# Altium PCB PCB1-PICO-IMU.PcbDoc
Units mm, origin at the board's own origin, x right, y up, seen from the top; angles counter-clockwise.
Board outline 18.29 x 15.26 mm, 4 copper layers (Top Layer, Layer 1, Layer 2, Bottom Layer), stack 0.603 mm thick; 29 components, 16 nets, 122 pads, 44 vias.
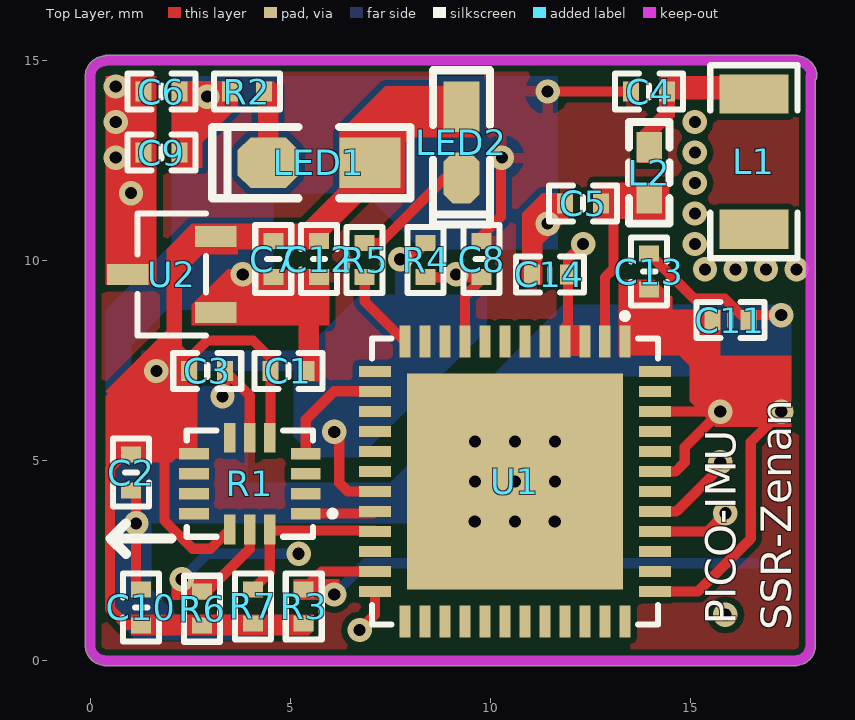
[diagram p0: Top Layer view]
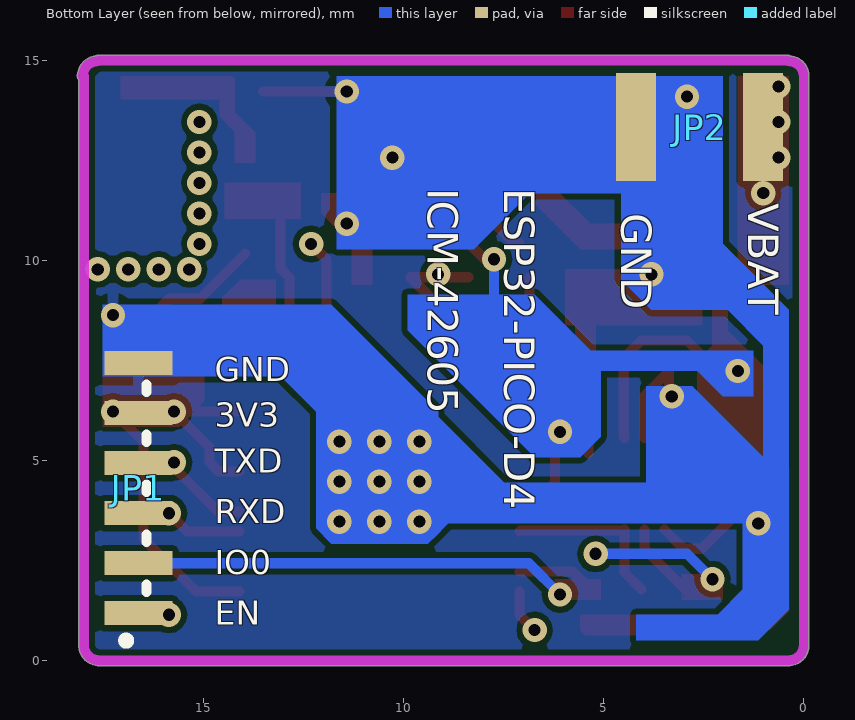
[diagram p1: Bottom Layer view, seen from below]
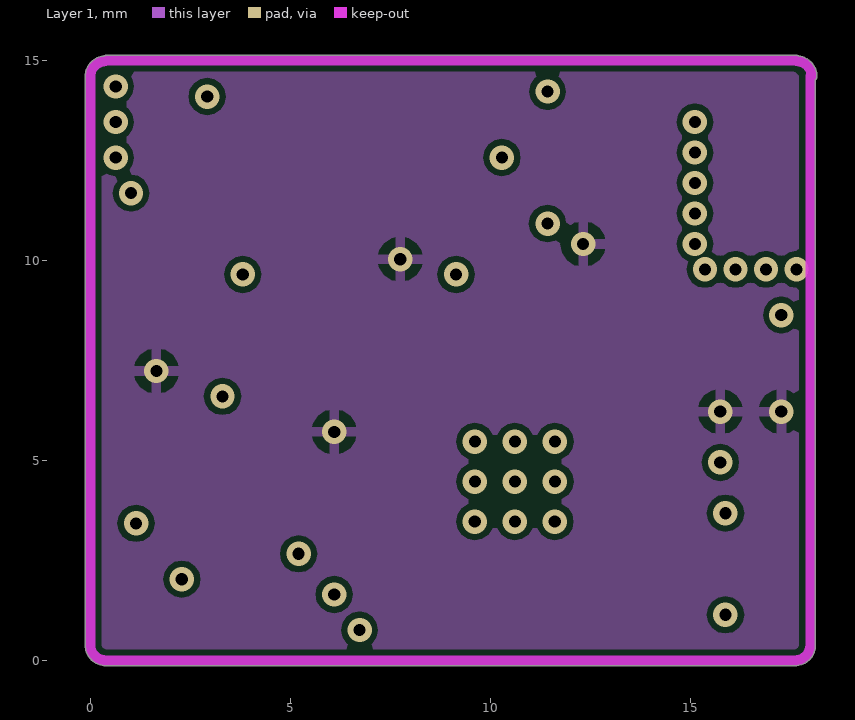
[diagram p2: Layer 1]
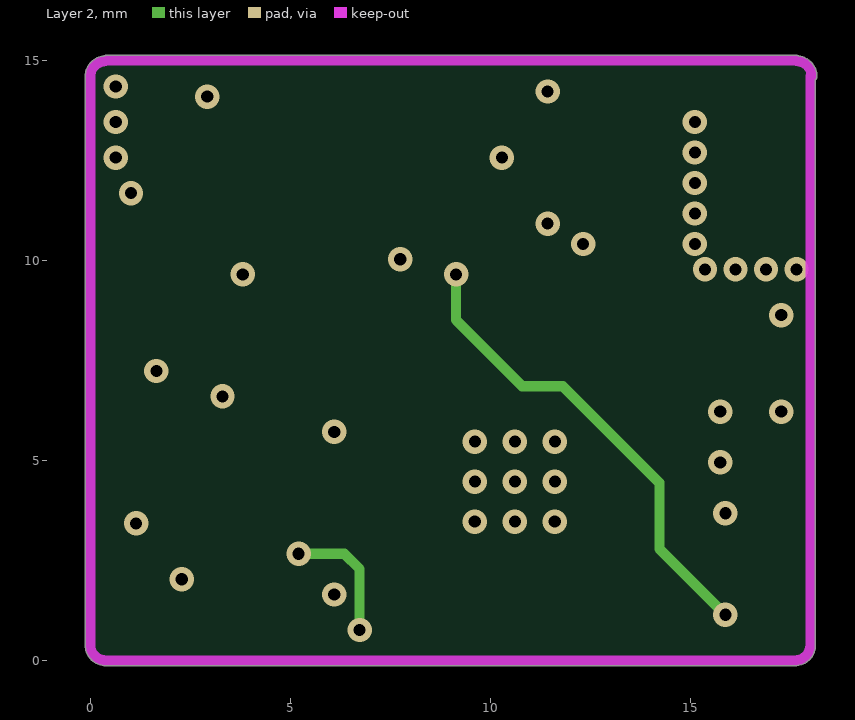
[diagram p3: Layer 2]
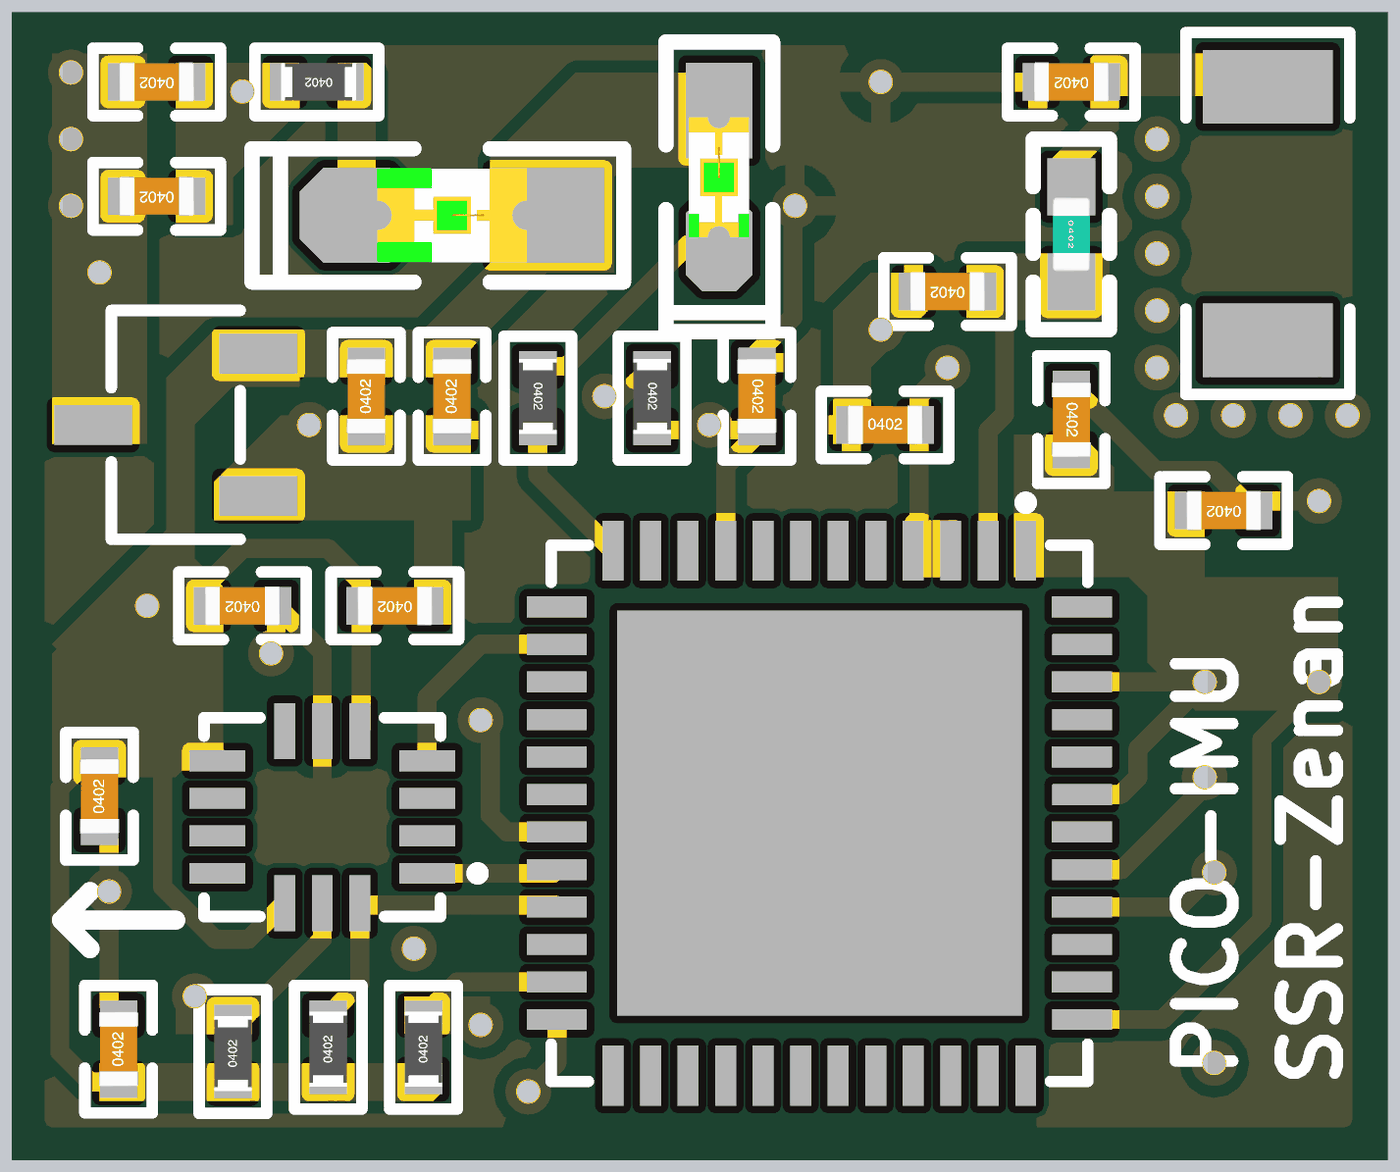
[diagram p4: 3D render of the assembled board from above, using the file's embedded part models]

## Layer stack, top to bottom
Top Solder: solder mask 0.0102, Solder Resist, Dk 3.5
Top Layer: signal copper 0.0356
Dielectric 2: prepreg 0.0711, PP-006, Dk 4.1
Layer 1: signal copper 0.035
Dielectric 1: dielectric 0.32, FR-4, Dk 4.8
Layer 2: signal copper 0.035
Dielectric 3: prepreg 0.0711, PP-006, Dk 4.1
Bottom Layer: signal copper 0.0356
Bottom Solder: solder mask 0.0102, Solder Resist, Dk 3.5

## Board outline
-0.127,0.381 ccw(c0.381,0.381) 0.381,-0.128 ccw(c0.381,0) 0.389,-0.127 17.611,-0.127 ccw(c17.619,0) 17.619,-0.128 ccw(c17.619,0.381) 18.128,0.381 ccw(c18.001,0.381) 18.128,0.389 18.128,14.518 ccw(c18.035,14.605) 18.162,14.605 ccw(c17.653,14.605) 17.718,15.109 ccw(c17.653,15) 17.653,15.127 0.395,15.127 ccw(c0.395,15) 0.333,15.111 ccw(c0.381,14.605) -0.127,14.605 ccw(c0,14.605) -0.127,14.597 -0.127,0.389 ccw(c0,0.381)

## Design rules (kind name [scope] priority, off if disabled: settings)
Clearance [All] p1: gap=0.152 ignorepadtopadclearanceinfootprint=FALSE except(0: Arc-Hole Track-Hole SMDPad-Hole THPad-Hole Via-Hole Fill-Hole Poly-Hole Region-Hole Text-Hole)
HoleToHoleClearance [All] p1: gap=0.102 allowstackedmicrovias=TRUE
MinimumSolderMaskSliver [All] p1: minsoldermaskwidth=0.102
PolygonConnect [All] p1: connectstyle=Relief reliefconductorwidth=0.254 reliefentries=4 polygonreliefangle="90 Angle" airgapwidth=0.254
RoutingVias [All] p1: holewidth=0.305 width=0.61 viastyle="Through Hole" minholewidth=0.305 minwidth=0.61 maxholewidth=0.381 maxwidth=0.635
SilkToSilkClearance [All] p1: silktosilkclearance=0.025
SilkToSolderMaskClearance [IsPad] p1: minsilkscreentomaskgap=0 clearancetoexposedcopper=TRUE
SolderMaskExpansion [All] p1: expansion=0.102
Width [All] p1: maxlimit=1.27 minlimit=0.152 preferedwidth=0.152
26 further rules are at their usual default settings.

## Classes and differential pairs
component class Sheet1: C1 C2 C3 C4 C5 C6 C7 C8 C9 C10 JP1 JP2 L1 L2 LED1 LED2 R1 R2 R3 R4 R5 R6 R7 U1 U2

## Components (designator, comment, footprint, x,y, rotation, side; value= is the part's Value field where it differs from the comment)
C1 "Cap" "C 0402_L" 4.953,7.239 r180 top value=10nF
C2 "Cap" "C 0402_L" 1.016,4.699 r90 top value=2.2uF
C3 "Cap" "C 0402_L" 2.921,7.239 r180 top value=0.1uF
C4 "Cap" "C 0402_L" 13.97,14.224 r180 top value=2.7pF
C5 "Cap" "C 0402_L" 12.319,11.43 r180 top value=4.7pF
C6 "Cap" "C 0402_L" 1.778,14.224 r180 top value=10uF
C7 "Cap" "C 0402_L" 4.572,10.033 r90 top value=10uF
C8 "Cap" "C 0402_L" 9.779,10.033 r270 top value=0.1uF
C9 "Cap" "C 0402_L" 1.778,12.7 r180 top value=100nF
C10 "Cap" "C 0402_L" 1.27,1.328 r90 top value=100nF
C11 "Cap" "C 0402_L" 16.002,8.509 r180 top value=10uF (schematic designator C7)
C12 "Cap" "C 0402_L" 5.715,10.033 r90 top value=10uF (schematic designator C7)
C13 "Cap" "C 0402_L" 13.97,9.721 r270 top value=10uF (schematic designator C7)
C14 "Cap" "C 0402_L" 11.488,9.652 r0 top value=10uF (schematic designator C7)
JP1 "HDR-1X6" debug 16.637,1.183 r90 bottom
JP2 "HDR-1X2" 电池焊接口 1.016,13.462 r0 bottom
L1 "陶瓷天线" Huaxin 16.51,12.573 r0 top
L2 "1.6nH" "L 0402" 13.97,12.192 r270 top
LED1 "红色" "LED 0805G" 5.715,12.446 r180 top
LED2 "红色" "LED 0603G" 9.271,12.954 r270 top
R1 "ICM-42605" ICM-42605 3.937,4.572 r180 top
R2 "10K" "R 0402_L" 3.937,14.224 r180 top
R3 "10K" "R 0402_L" 5.334,1.328 r90 top
R4 "10K" "R 0402_L" 8.382,10.033 r270 top
R5 "600" "R 0402_L" 6.858,10.033 r270 top
R6 "4.7K" "R 0402_L" 2.794,1.27 r90 top
R7 "4.7K" "R 0402_L" 4.064,1.328 r90 top
U1 "ESP32-PICO-D4" ESP32-PICO-D4 10.691,4.497 r180 top
U2 "ME6210A33M3G" ME6210A33M3G 2.032,9.652 r0 top

## Footprints (in the part's own frame and the unit in brackets; to place one, negate y for a bottom-side part, rotate by r counter-clockwise, add the part's x,y. Pads: shape width x height; smd on the part's side, far side on the other; paste and mask are expansions set on the pad)
"C 0402_L" [mm] "无极性贴片电容"
  rect 0.4x0.5 smd: 1(-0.45,0) 2(0.45,0)
  silkscreen extent -0.85,-0.45 0.85,0.45, body extent -0.5,-0.26 0.5,0.26, height 0.53
debug [mm]
  rect 0.6x1.7 smd: 1(0,0) 2(1.25,0) 3(2.5,0) 4(3.75,0) 5(5,0) 6(6.25,0)
  silkscreen extent -0.79,-0.2 5.72,0.4
ESP32-PICO-D4 [mm]
  rect 0.28x0.8 smd: 1(-2.671,-3.476) 2(-2.171,-3.476) 3(-1.671,-3.476) 4(-1.171,-3.476) 5(-0.671,-3.476) 6(-0.171,-3.476) 7(0.329,-3.476) 8(0.829,-3.476) 9(1.329,-3.476) 10(1.829,-3.476) 11(2.329,-3.476) 12(2.829,-3.476) 25(2.829,3.524) 26(2.329,3.524) 27(1.829,3.524) 28(1.329,3.524) 29(0.829,3.524) 30(0.329,3.524) 31(-0.171,3.524) 32(-0.671,3.524) 33(-1.171,3.524) 34(-1.671,3.524) 35(-2.171,3.524) 36(-2.671,3.524)
  rect 0.8x0.28 smd: 13(3.579,-2.726) 14(3.579,-2.226) 15(3.579,-1.726) 16(3.579,-1.226) 17(3.579,-0.726) 18(3.579,-0.226) 19(3.579,0.274) 20(3.579,0.774) 21(3.579,1.274) 22(3.579,1.774) 23(3.579,2.274) 24(3.579,2.774) 37(-3.421,2.774) 38(-3.421,2.274) 39(-3.421,1.774) 40(-3.421,1.274) 41(-3.421,0.774) 42(-3.421,0.274) 43(-3.421,-0.226) 44(-3.421,-0.726) 45(-3.421,-1.226) 46(-3.421,-1.726) 47(-3.421,-2.226) 48(-3.421,-2.726)
  rect 5.4x5.4 smd: 49(0.079,0.024)
  silkscreen extent -3.5,-4.19 3.66,3.6
Huaxin [mm] "陶瓷天线"
  rect 1.728x0.984 smd: 1(0.079,-1.795) 2(0.079,1.589)
  silkscreen extent -1.01,-2.52 1.17,2.31
ICM-42605 [mm]
  rect 0.745x0.28 smd: 1(-1.445,0.901) 2(-1.445,0.401) 3(-1.445,-0.099) 4(-1.445,-0.599) 8(1.35,-0.599) 9(1.35,-0.099) 10(1.35,0.401) 11(1.35,0.901)
  rect 0.28x0.745 smd: 5(-0.548,-0.997) 6(-0.048,-0.997) 7(0.452,-0.997) 12(0.452,1.298) 13(-0.048,1.298) 14(-0.548,1.298)
  silkscreen extent -2.19,-1.18 1.53,1.48
"L 0402" [mil] "小功率贴片电感"
  rect 30x25 smd: 1(-25,0) 2(25,0)
  silkscreen extent -50,-20 50,20, body extent -20,-10 20,10, height 20
"LED 0603G" [mil] "绿色0603LED"
  rect 50x35 smd: 1(-35,0.26)
  oct 50x35 smd: 2(35,0.26)
  silkscreen extent -71,-28 81,28, body extent -31,-16 32,16, height 18
"LED 0805G" [mil] "绿色0805LED"
  rect 60x50 smd: 1(-50,0)
  oct 60x50 smd: 2(50,0)
  silkscreen extent -90,-35 105,35, body extent -39,-25 39,25, height 32
ME6210A33M3G [mm]
  rect 1.037x0.532 smd: 1(1.101,-0.95) 2(1.101,0.95) 3(-1.101,0)
  silkscreen extent -0.86,-1.53 0.86,1.53
"R 0402_L" [mm] "1/16W贴片电阻"
  rect 0.4x0.5 smd: 1(-0.4,0) 2(0.45,0)
  silkscreen extent -0.8,-0.45 0.85,0.45, body extent -0.5,-0.25 0.5,0.25, height 0.3
电池焊接口 [mm]
  rect 1x2.7 smd: 1(0.01,0.127) 2(3.175,0.127)

## Part data
C1 C2 C3 C4 C5 C6 C7 C8 C9 C10 C11 C12 C13 C14: "Capacitor", LatestRevisionDate=17-Jul-2002, LatestRevisionNote="Re-released for DXP Platform.", PackageDescription="Radial Cap, Thru-Hole; 2 Leads; 0.3 in Pin Spacing", PackageReference=RAD-0.3, Published=8-Jun-2000, Publisher="Altium Limited"
JP1: library part "Header 6", "6P接插件", BOM名称=6P接插件, 学习资源=www.ooocke.com, 版权归属=源创客
JP2: library part "Header 2", "2P接插件", BOM名称=2P接插件, 学习资源=www.ooocke.com, 版权归属=源创客
L1: library part Huaxin, BOM_JLCPCB Part Class="Extended Part", BOM_Manufacturer="Huaxin S&T", BOM_Manufacturer Part=RFECA3216060A1T, BOM_Supplier=LCSC, BOM_Supplier Part=C127620, Contributor=LCSC, nameAlias=Value, spicePre=L, spiceSymbolName=RFECA3216060A1T
L2: library part L, "小功率贴片电感", BOM名称=小功率贴片电感, 学习资源=www.ooocke.com, 版权归属=源创客
LED1 LED2: library part LED-SMD, "贴片LED", BOM名称=贴片LED, 学习资源=www.ooocke.com, 版权归属=源创客
R1: BOM_JLCPCB Part Class="Extended Part", BOM_Manufacturer=InvenSense, BOM_Manufacturer Part=ICM-42605, BOM_Supplier=LCSC, BOM_Supplier Part=C2655099, Contributor=LCSC, spicePre=R, spiceSymbolName=ICM-42605
R2 R3 R4 R5 R6 R7: library part R, "贴片电阻", BOM名称=贴片电阻, 学习资源=www.ooocke.com, 版权归属=源创客
U1: BOM_JLCPCB Part Class="Extended Part", BOM_Manufacturer="Espressif Systems", Frequency=-, BOM_Manufacturer Part=ESP32-PICO-D4, BOM_Supplier=LCSC, BOM_Supplier Part=C193707, Contributor=LCSC, spicePre=U, spiceSymbolName=ESP32-PICO-D4
U2: BOM_JLCPCB Part Class="Extended Part", BOM_Manufacturer="Nanjing Micro One Elec", BOM_Manufacturer Part=ME6210A33M3G, BOM_Supplier=LCSC, BOM_Supplier Part=C236680, Contributor=LCSC, spicePre=U, spiceSymbolName=ME6210A33M3G

## Via types
v1: diameter 0.61, hole 0.305, Top Layer to Bottom Layer, tented both sides, 44 vias

## Nets (pads, with @x,y where several pads share a name; then routed paths per layer and width w, separated by ;. In a path a pad name is that pad's centre, name@x,y a point inside that pad or via, vN(x,y) a via of type N, cw(c..) or ccw(c..) an arc to the next point about the centre after c; other vN are vias at no path point)
3V3: C1.2 C2.2 C3.2 C7.2 C10.1 C11.2 C12.2 C13.2 C14.2 JP1.5 LED1.1 LED2.1 R1.5 R1.8 R1.12 R3.1 R4.1 R6.1 R7.1 U1.1 U1.3 U1.4 U1.19 U1.37 U1.43 U1.46 U2.2 | length 39.6
  Top Layer w0.254: C10.1 1.259,0.889 0.889,0.889 0.487,1.291 0.487,4.805 0.831,5.149 C2.2 1.038,5.171 1.813,5.171 ; R1.12 3.005,2.794 2.557,2.794 1.854,3.497 1.854,5.13 1.813,5.171 ; R1.5 4.503,5.587 C1.2 4.503,7.562 4.064,8.001 2.921,8.001 2.471,7.551 C3.2 2.471,5.288 R1.8 1.813,5.171 ; v1@6.223,5.588 6.223,4.445 6.445,4.223 U1.19 ; v1(7.747,10.033) 7.982,10.033 R4.1 ; U1.4 11.862,8.321 11.938,8.397 C14.2 11.938,10.033 v1(12.319,10.414) ; U1.1 13.362,8.409 13.589,8.636 14.224,8.636 ; U1.37 15.185,1.723 16.51,3.048 16.51,5.461 v1(17.272,6.223) ; U1.43 14.629,4.723 14.859,4.953 14.859,5.334 v1(15.748,6.223) ; U1.46 v1(15.748,6.223) ; 14.351,8.636 14.224,8.636 ; 14.224,8.636 14.097,8.509 15.113,7.493 15.113,6.858 v1(15.748,6.223)
  Bottom Layer w0.254: v1(7.747,10.033) 7.747,8.763 7.874,8.636
  other v1: 6.096,5.715 1.651,7.239
AD0: R1.1 U1.20 | length 1.8
  Top Layer w0.254: R1.1 7.06,3.671 U1.20
EN: C8.2 JP1.1 R4.2 U1.9 | length 15.2
  Top Layer w0.254: R4.2 C8.2 9.837,9.583 9.362,9.108 U1.9
  Layer 2 w0.254: v1(9.144,9.652) 9.144,8.509 10.795,6.858 11.811,6.858 14.224,4.445 14.224,2.794 v1(15.875,1.143)
GND: C1.1 C2.1 C3.1 C4.2 C5.2 C6.1 C7.1 C8.1 C9.1 C10.2 C11.1 C12.1 C13.1 C14.1 JP1.6 JP2.2 R1.6 R2.2 U1.49 U2.1 | length 14
  Top Layer w0.254: C2.1 1.143,4.122 v1(1.143,3.429) 1.143,1.905 C10.2 ; v1(3.302,6.604) 3.371,6.673 C3.1 3.985,6.625 R1.6 ; C8.1@9.652,10.483 10.262,11.093 10.262,12.548 v1(10.287,12.573) ; v1(11.43,14.224) C4.2 ; v1@11.542,10.976 C5.2@11.869,11.303 ; C13.1 15.099,9.042 15.864,9.042 16.27,8.636 v1(17.272,8.636)
  other v1: 9.612,3.473 10.612,3.473 11.612,3.473 9.612,4.473 10.612,4.473 11.612,4.473 9.612,5.473 10.612,5.473 11.612,5.473 3.81,9.652 11.43,10.922 2.921,14.097
INT0: R1.4 U1.14 | length 2.9
  Top Layer w0.254: R1.4 5.382,6.017 6.096,6.731 7.104,6.731 U1.14
IO0: JP1.2 R3.2 U1.23 | length 12.8
  Top Layer w0.254: R3.2 5.779,2.223 U1.23
  Bottom Layer w0.254: v1(6.096,1.651) 6.878,2.433 JP1.2
LED0: R5.2 U1.12 | length 2
  Top Layer w0.254: R5.2 6.858,8.977 U1.12
NetC4_1: C4.1 L1.2 L2.1
NetC5_1: C5.1 L2.2 U1.2 | length 3.7
  Top Layer w0.254: C5.1 13.081,11.118 13.081,9.793 12.862,9.574 U1.2
NetLED1_2: LED1.2 R2.1
NetLED2_2: LED2.2 R5.1 | length 2.8
  Top Layer w0.254: 7.112,10.433 7.239,10.433 8.871,12.065 LED2.2
RXD0: JP1.3 U1.40 | length 2
  Top Layer w0.254: U1.40 15.415,3.223 v1(15.875,3.683)
SCL0: R1.13 R6.2 U1.24 | length 9.7
  Top Layer w0.254: R6.2 2.911,1.72 3.985,2.794 R1.13 ; v1(5.207,2.667) v1@5.263,2.723 ; v1(6.731,0.762) 7.112,1.143 U1.24
  Layer 2 w0.254: v1(5.207,2.667) 6.35,2.667 6.731,2.286 v1(6.731,0.762)
  Bottom Layer w0.254: v1(2.286,2.032) 2.921,2.667 v1(5.207,2.667)
SDA0: R1.14 R7.2 U1.21 | length 4.3
  Top Layer w0.254: R7.2 4.485,2.199 R1.14@4.485,3.252 ; R1.14 R1.14@4.485,3.252 ; U1.21 7.083,3.252 R1.14@4.485,3.252
TXD0: JP1.4 U1.41 | length 2.2
  Top Layer w0.254: U1.41 14.645,3.723 15.748,4.826 v1(15.748,4.953)
VBAT: C6.2 C9.2 JP2.1 U2.3
  other v1: 1.016,11.684 0.635,12.573 0.635,13.462 0.635,14.351
pads on no net: L1.1 R1.2 R1.3 R1.7 R1.9 R1.10 R1.11 U1.5 U1.6 U1.7 U1.8 U1.10 U1.11 U1.13 U1.15 U1.16 U1.17 U1.18 U1.22 U1.25 U1.26 U1.27 U1.28 U1.29 U1.30 U1.31 U1.32 U1.33 U1.34 U1.35 U1.36 U1.38 U1.39 U1.42 U1.44 U1.45 U1.47 U1.48
copper on no net:
  other v1: 15.367,9.779 16.129,9.779 16.891,9.779 17.653,9.779 15.113,10.414 15.113,11.176 15.113,11.938 15.113,12.7 15.113,13.462

## Polygon pours and split planes (outlines as drawn)
3V3 on Layer 1 "3V3_L02_P002" (solid, pour order 2): 0,14.605 0.381,14.986 17.78,14.986 18.034,14.732 18,14.698 18,0.22 17.78,0 0.254,0 0,0.254
GND on Top Layer "GND_L01_P004" (solid, pour order 4): 0.254,14.859 17.78,14.859 17.78,0.127 0.254,0.127
GND on Bottom Layer "GND_L04_P006" (solid, pour order 6): 0,14.732 0.254,14.986 17.653,14.986 18.034,14.605 18.034,0.254 17.78,0 0.254,0 0.254,0.127 0,0.381

## Keep-outs
Keep-Out Layer:
  lines w0.254: 0.381,14.986 ccw(c0.381,14.605) 0,14.605 0,0.381 ccw(c0.381,0.381) 0.381,0 15,0 17.619,0 ccw(c17.619,0.381) 18,0.381 18,9.906 18,14.605 ; 0.395,15 17.653,15 ; 17.653,14.986 cw(c17.653,14.605) 18.034,14.605
Mechanical 1:
  lines w0.254: 0.381,14.986 ccw(c0.381,14.605) 0,14.605 0,0.381 ccw(c0.381,0.381) 0.381,0 15,0 17.62,0 ; 0.395,15 17.653,15 ; 17.619,0 ccw(c17.619,0.381) 18.001,0.381 ; 17.653,14.986 cw(c17.653,14.605) 18.035,14.605 ; 18,0.381 18,9.906 18,14.605

## Other copper
Top Layer:
  region net 3V3: 13.335,7.62 14.732,7.62 14.986,7.366 14.986,6.477 15.621,5.842 17.526,5.842 17.526,7.62 15.748,7.62 15.748,8.763 13.208,8.763 13.208,7.62
  region net 3V3: 17.526,5.842 15.621,5.842 15.367,6.096 15.367,6.731 17.272,6.731 17.526,6.477
  region net 3V3: 2.54,10.922 1.905,10.287 1.905,8.255 0.381,6.731 0.699,6.413 2.667,6.413 2.667,7.493 2.286,7.874 2.286,9.652 2.794,10.16 3.683,10.16 3.683,10.922
  region net IO0: 6.223,1.524 6.223,2.032 5.08,2.032 5.08,1.524
  region net 3V3: 1.27,7.493 0.381,6.604 0.381,4.91 0.487,4.805 0.635,4.953 2.032,4.953 2.159,5.08 2.794,5.08 2.667,5.334 2.667,7.493
  region net SCL0: 2.911,1.72 3.048,1.583 3.048,1.524 2.032,1.524 2.032,2.159 3.048,2.159 3.048,1.524
  region net 3V3: 4.096,1.143 5.588,1.143 5.588,0.762 5.461,0.635 4.191,0.635 4.191,1.143 4.191,0.762
  region net 3V3: 4.191,1.143 4.191,0.762 4.318,0.635 1.016,0.635 1.016,1.143
  region net GND: 5.207,6.985 5.207,8.636 4.699,9.144 4.699,9.779 5.08,9.779 5.08,9.271 5.715,8.636 5.715,6.985
  region net NetC4_1: 14.287,14.605 17.081,14.605 17.081,14.033 14.287,14.034
  region net GND: 5.969,9.779 3.429,9.779 2.54,8.89 2.54,8.382 5.969,8.382
  region net 3V3: 6.223,13.208 7.366,14.351 9.652,14.351 9.652,13.081 8.001,13.081 7.874,12.954 7.874,11.684 6.35,11.684 6.223,11.811
  region net 3V3: 2.54,10.922 2.54,10.16 2.667,10.033 2.921,10.287 5.588,10.287 6.985,11.684 7.874,11.684 7.874,13.208 6.223,13.208 6.223,11.811 5.334,10.922
  region net NetLED1_2: 4.191,14.478 4.191,13.081 3.81,12.7 3.81,12.192 4.953,12.192 4.699,12.446 4.699,14.351 4.572,14.478
  region net GND: 2.032,14.478 2.032,12.319 2.794,12.319 2.794,12.954 3.683,13.843 3.683,14.478
  region net VBAT: 1.651,14.605 0.381,14.605 0.381,9.398 1.651,9.398
  region net NetC5_1: 12.573,11.938 12.573,11.049 14.478,11.049 14.478,11.938
  region net 3V3: 13.208,9.525 14.097,9.525 14.541,9.081 14.541,8.319 14.478,8.255 14.097,8.636 13.208,8.636
  region net GND: 10.795,11.176 11.303,11.684 12.065,11.684 12.065,11.176 11.303,10.414 11.303,9.398 10.795,9.398
  region net 3V3: 11.811,8.27 11.811,7.62 12.446,7.62 12.446,8.382 11.953,8.382 11.938,8.397
  region net NetC4_1: 13.716,13.208 14.224,13.716 14.224,14.541 14.287,14.605 14.605,14.605 14.605,13.589 14.224,13.208 14.224,12.446 13.716,12.446
Bottom Layer:
  region net 3V3: 1.27,7.747 1.27,6.604 2.032,6.604 2.667,7.239 5.08,7.239 5.08,5.588 5.588,5.08 6.731,5.08 9.906,8.255 9.906,9.144 6.731,9.144 5.334,7.747
  region net GND: 3.937,6.858 3.937,4.445 3.429,3.937 0.889,3.937 0.889,4.953 2.794,6.858
  region net GND: 1.27,3.429 8.89,3.429 9.271,3.048 9.335,3.111 12.002,3.111 12.002,5.779 11.684,6.096 9.144,6.096 7.493,4.445 0.635,4.445 0.635,3.048 0.762,2.921
  region net GND: 2.032,14.351 2.032,9.017 3.81,9.017 4.572,9.779 4.572,14.351
  region net GND: 4.572,9.525 3.81,8.763 1.905,8.763 1.016,7.874 1.016,4.953 1.524,4.445 1.524,1.778 2.159,1.143 4.191,1.143 4.191,0.508 1.143,0.508 0.381,1.27 0.381,8.763 3.81,12.192 4.572,12.192
  region net GND: 3.683,14.605 11.684,14.605 11.684,10.287 8.255,10.287 6.858,11.684 3.556,11.684 3.556,14.478
  region net GND: 2.032,14.351 2.032,11.811 4.699,11.811 4.699,14.605 2.032,14.605
  region net GND: 17.526,8.89 11.811,8.89 9.144,6.223 9.144,5.588 12.192,5.588 12.192,6.223 13.081,7.112 17.526,7.112
  region net GND: 9.144,6.223 9.144,3.175 9.398,2.921 11.811,2.921 12.192,3.302 12.192,6.223

## Silkscreen, mask and mechanical layers (free items; w line width, h text height)
Top Overlay:
  lines w0.254: 0.889,2.667 0.508,3.048 ; 0.889,3.429 0.508,3.048 ; 2.032,3.048 0.508,3.048
  text "PICO-IMU" at 16.129,0.889 h0.76 r90
  text "SSR-Zenan" at 17.526,0.762 h0.76 r90
Bottom Overlay:
  text "ESP32-PICO-D4" at 7.493,11.811 h0.76 r90
  text "ICM-42605" at 9.398,11.811 h0.76 r90
  text "VBAT" at 1.397,11.43 h0.76 r90
  text "GND" at 4.572,11.176 h0.76 r90
  text "GND" at 14.732,6.985 h0.6
  text "3V3" at 14.732,5.842 h0.6
  text "TXD" at 14.732,4.699 h0.6
  text "RXD" at 14.732,3.429 h0.6
  text "IO0" at 14.732,2.159 h0.6
  text "EN" at 14.732,0.889 h0.6
Mechanical 1:
  lines w0.25: 0.333,15.111 cw(c0.395,15) 0.395,15.127 17.653,15.127 cw(c17.653,15) 17.718,15.109 cw(c17.653,14.605) 18.162,14.605 cw(c18.035,14.605) 18.128,14.518 18.128,0.389 cw(c18.001,0.381) 18.128,0.381 cw(c17.619,0.381) 17.619,-0.128 cw(c17.619,0) 17.611,-0.127 0.389,-0.127 cw(c0.381,0) 0.381,-0.128 cw(c0.381,0.381) -0.127,0.381 cw(c0,0.381) -0.127,0.389 -0.127,14.597 cw(c0,14.605) -0.127,14.605 cw(c0.381,14.605) 0.333,15.111 ; 0.333,15.111 0.333,15.111